# Altium PCB transmitter.PcbDoc
Units mil, origin at the board's own origin, x right, y up, seen from the top; angles counter-clockwise.
Board outline 1968.5 x 3897.64 mil, 2 copper layers (Top Layer, Bottom Layer); 38 components, 10 nets, 105 pads, 26 vias.
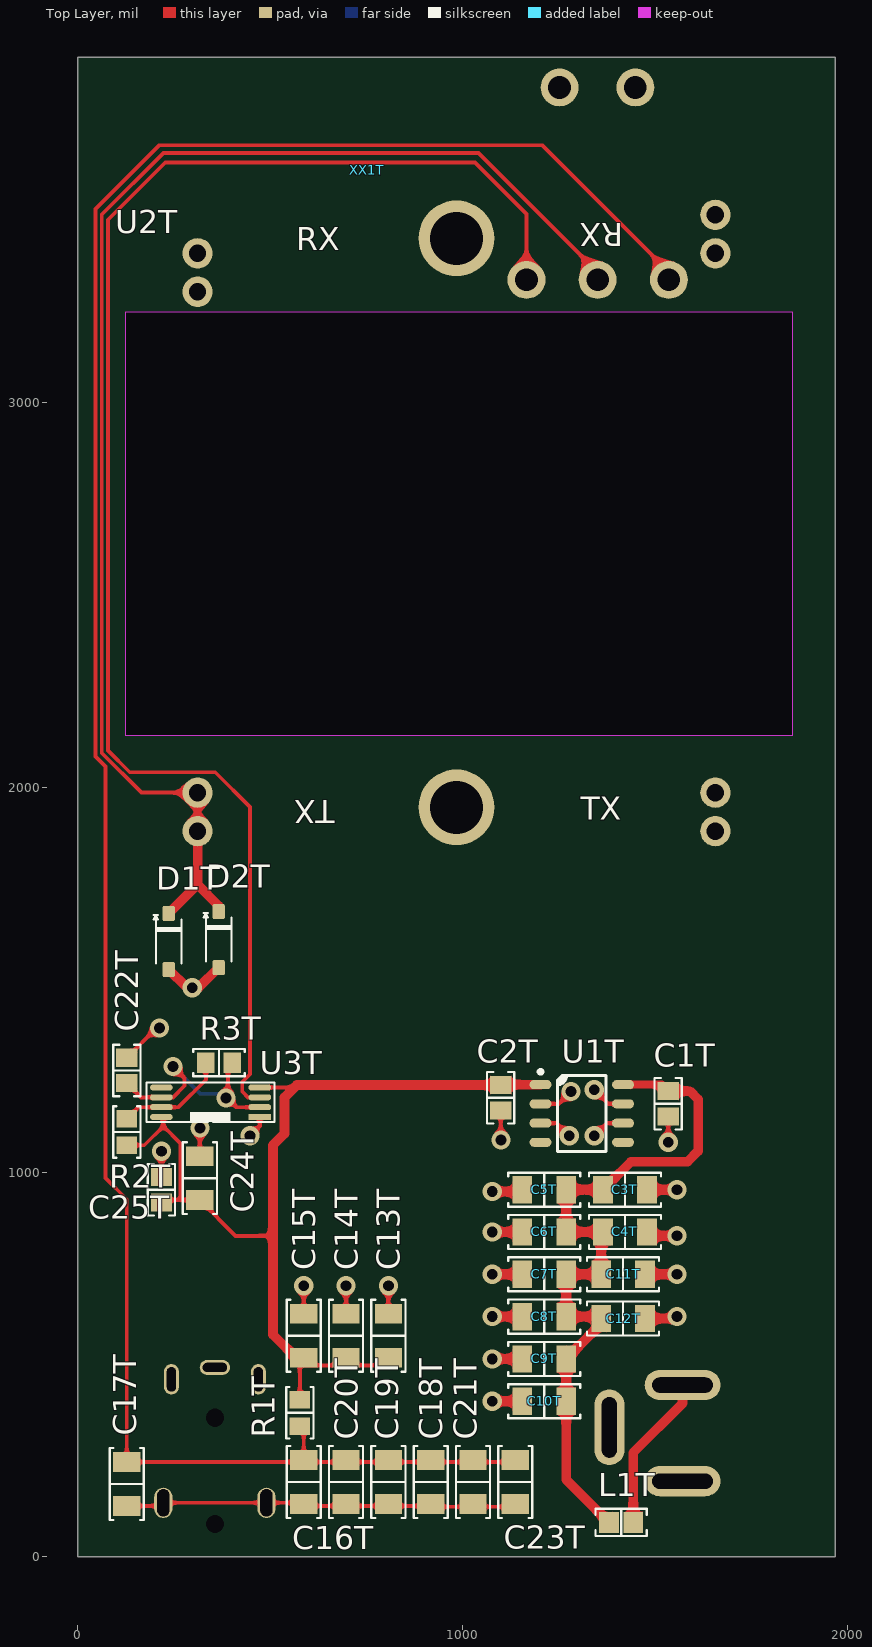
[diagram p0: Top Layer view]
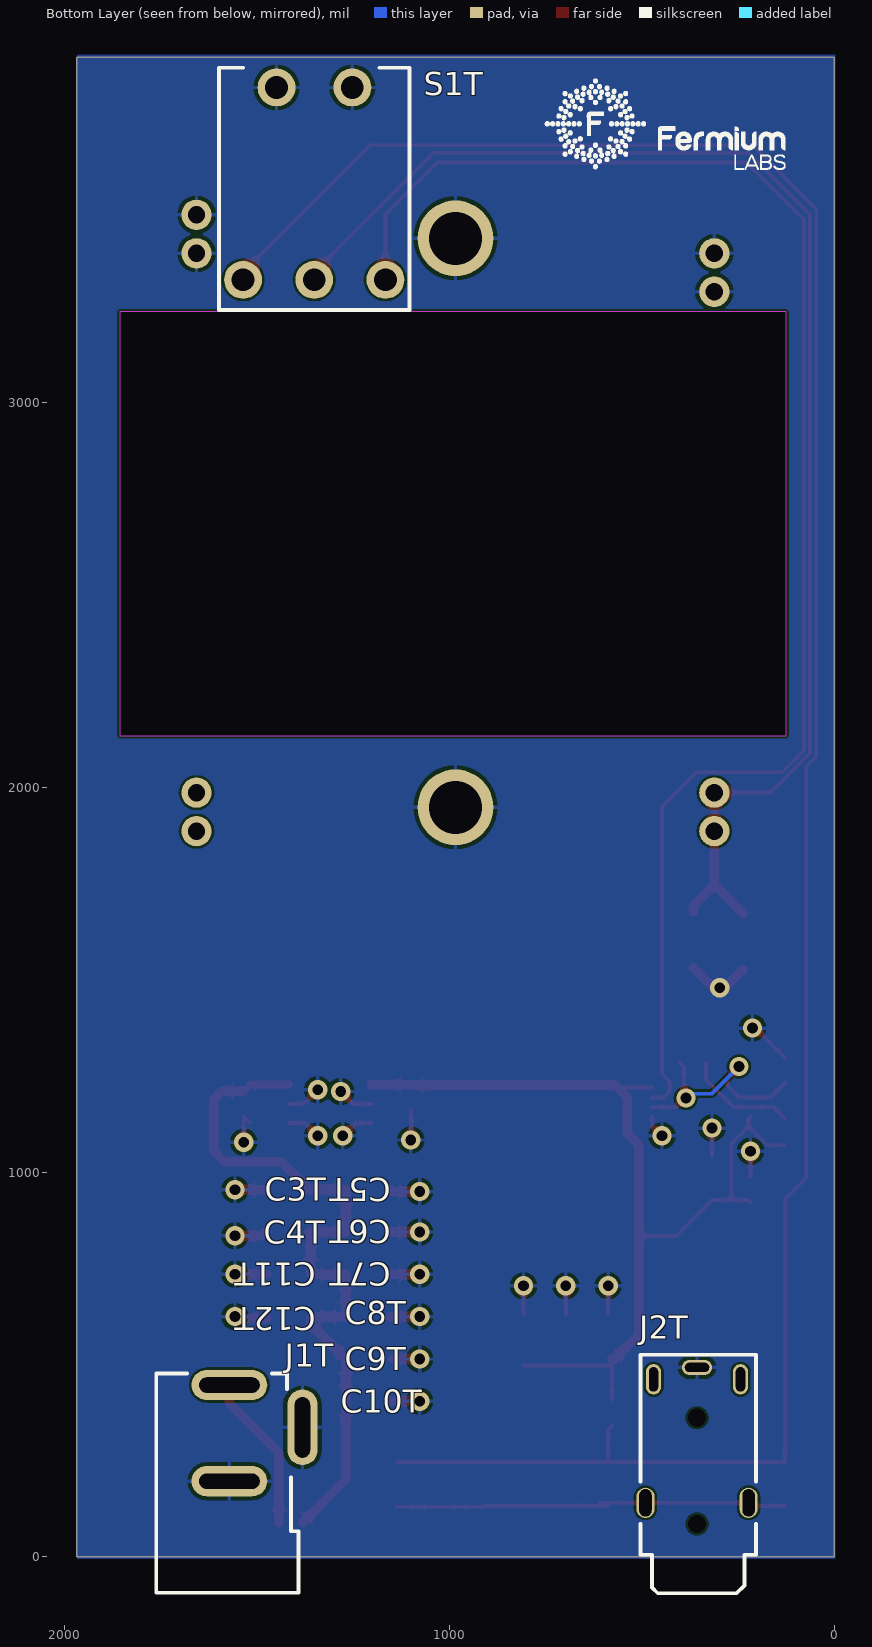
[diagram p1: Bottom Layer view, seen from below]

## Layer stack, top to bottom
Top Solder: solder mask 0.4, Solder Resist, Dk 3.5
Top Layer: signal copper 1.4
Dielectric 1: dielectric 12.6, FR-4, Dk 4.8
Bottom Layer: signal copper 1.4
Bottom Solder: solder mask 0.4, Solder Resist, Dk 3.5

## Board outline
0,0 1968.5,0 1968.5,3897.64 0,3897.64

## Design rules (kind name [scope] priority, off if disabled: settings)
Clearance [All] p1: gap=6 ignorepadtopadclearanceinfootprint=FALSE
FanoutControl Fanout_LCC [All] p1 off: bgadir=Out bgaviamode=Centered fanoutstyle=Auto fanoutdirection=Alternating viagrid=1 // Protel DXP Scope 1 Expression Was: IsLCC   Fanout_LCC (Default Rule)
FanoutControl Fanout_BGA [All] p2 off: bgadir=Out bgaviamode=Centered fanoutstyle=Auto fanoutdirection=Alternating viagrid=1 // Protel DXP Scope 1 Expression Was: IsBGA   Fanout_BGA (Default Rule)
FanoutControl Fanout_SOIC [All] p3 off: bgadir=Out bgaviamode=Centered fanoutstyle=Auto fanoutdirection=Alternating viagrid=1 // Protel DXP Scope 1 Expression Was: IsSOIC   Fanout_SOIC (Default Rule)
FanoutControl Fanout_Default [All] p4: bgadir=Out bgaviamode=Centered fanoutstyle=Auto fanoutdirection=Alternating viagrid=1 // Fanout_Default (Default Rule)
FanoutControl Fanout_Small [All] p5 off: bgadir=Out bgaviamode=Centered fanoutstyle=Auto fanoutdirection=Alternating viagrid=1 // Protel DXP Scope 1 Expression Was: (CompPinCount < 5)   Fanout_Small (Default Rule)
HoleSize [All] p1: absolutevalues=TRUE maxlimit=99999 minlimit=11.81 maxpercent=80.000 minpercent=20.000
MinimumSolderMaskSliver [All] p1 off: minsoldermaskwidth=10
PolygonConnect [All] p1: connectstyle=Relief reliefconductorwidth=10 reliefentries=4 polygonreliefangle="90 Angle" airgapwidth=10
RoutingVias [All] p1: holewidth=28 width=50 viastyle="Through Hole" minholewidth=28 minwidth=50 maxholewidth=28 maxwidth=50
SilkToSilkClearance [All] p1: silktosilkclearance=7.87
SilkToSolderMaskClearance [All] p1 off: minsilkscreentomaskgap=10 clearancetoexposedcopper=TRUE // Protel DXP Scope 1 Expression Was: IsPad
SolderMaskExpansion [All] p1: expansion=2
Width [All] p1: maxlimit=200 minlimit=6 preferedwidth=10
21 further rules are at their usual default settings.

## Components (designator, comment, footprint, x,y, rotation, side; value= is the part's Value field where it differs from the comment)
C1T "100nF 0805" "CAP 0805_2012" 1534.57,1177.91 r270 top
C2T "100nF 0805" "CAP 0805_2012" 1099.24,1193.65 r270 top
C3T "10uF 25V 1206" "CAP 1206_3216" 1422.24,954.65 r0 top
C4T "10uF 25V 1206" "CAP 1206_3216" 1422.24,844.65 r0 top
C5T "10uF 25V 1206" "CAP 1206_3216" 1212.24,954.65 r180 top
C6T "10uF 25V 1206" "CAP 1206_3216" 1212.24,844.65 r180 top
C7T "10uF 25V 1206" "CAP 1206_3216" 1212.24,734.65 r180 top
C8T "10uF 25V 1206" "CAP 1206_3216" 1212.24,624.65 r180 top
C9T "10uF 25V 1206" "CAP 1206_3216" 1212.24,514.65 r180 top
C10T "10uF 25V 1206" "CAP 1206_3216" 1212.24,404.65 r180 top
C11T "10uF 25V 1206" "CAP 1206_3216" 1417.24,734.65 r0 top
C12T "10uF 25V 1206" "CAP 1206_3216" 1417.24,619.65 r0 top
C13T "10uF 25V 1206" "CAP 1206_3216" 807.24,574.65 r90 top
C14T "10uF 25V 1206" "CAP 1206_3216" 697.24,574.65 r90 top
C15T "10uF 25V 1206" "CAP 1206_3216" 587.24,574.65 r90 top
C16T "10uF 25V 1206" "CAP 1206_3216" 587.24,194.65 r270 top
C17T "10uF 25V 1206" "CAP 1206_3216" 127.24,189.65 r270 top
C18T "10uF 25V 1206" "CAP 1206_3216" 917.24,194.65 r270 top
C19T "10uF 25V 1206" "CAP 1206_3216" 807.24,194.65 r270 top
C20T "10uF 25V 1206" "CAP 1206_3216" 697.24,194.65 r270 top
C21T "10uF 25V 1206" "CAP 1206_3216" 1027.24,194.65 r270 top
C22T "100nF 0805" "CAP 0805_2012" 127.24,1264.65 r90 top
C23T "10uF 25V 1206" "CAP 1206_3216" 1137.24,194.65 r270 top
C24T "10uF 25V 1206" "CAP 1206_3216" 317.24,984.65 r90 top
C25T "100nF 0805" "CAP 0805_2012" 217.24,954.65 r90 top
D1T "5.6V" SOD123 236.24,1599.65 r270 top
D2T "D Schottky" SOD123 366.24,1604.65 r270 top
J1T "DC-10A FC68148" dc-jack 1571.8,446.85 r270 bottom
J2T "FC68125" FC68125 -196.76,-854.35 r90 bottom
L1T "BLM21AG102SN1D" "FER 0805_2012" 1412.24,89.65 r180 top
R1T "33R 0805" "RES 0805_2012" 577.24,374.65 r270 top
R2T "1K 0805" "RES 0805_2012" 127.24,1104.65 r270 top
R3T "10K 0805" "RES 0805_2012" 367.24,1284.65 r180 top
S1T "TSM102C3" TSM102C3 1536.24,3319.65 r180 bottom
U1T "L78L06ACD" "ST SOIC-8N" 1309.96,1152.65 r0 top
U2T "HB100" HB100-BURIED 1657.24,1886.65 r90 top
U3T "NE555PWR" TSSOP8 473.15,1143.46 r180 top
XX1T "FermiumLABS Logo" frm-med 752.24,3604.65 r180 top

## Footprints (in the part's own frame and the unit in brackets; to place one, negate y for a bottom-side part, rotate by r counter-clockwise, add the part's x,y. Pads: shape width x height; smd on the part's side, far side on the other; paste and mask are expansions set on the pad)
"CAP 0805_2012" [mm]
  rect 1.2x1.4 smd: 1(-0.838,0) 2(0.838,0)
  silkscreen extent -1.7,-0.9 1.7,0.9, body extent -1,-0.64 1,0.64, height 1.26
"CAP 1206_3216" [mm]
  rect 1.3x1.8 smd: 1(-1.45,0) 2(1.45,0)
  silkscreen extent -2.37,-1.12 2.37,1.12, body extent -1.6,-0.81 1.6,0.81, height 1.62
dc-jack [mm]
  oval 2x5 hole 1 slot 4 at 90 deg: 1(0,0) 3(6.35,0)
  oval 5x2 hole 1 slot 4 at 0 deg: 2(2.794,4.826)
  silkscreen extent -0.76,-4.83 13.72,4.57, body extent -0.76,-4.62 13.54,5.13, height 11.3
FC68125 [mm]
  oval 1x2 hole 0.6 slot 1.6 at 90 deg: 1(34.214,14.046)
  oval 2x1 hole 0.6 slot 1.6 at 0 deg: 2(33.426,16.916) 6(33.426,11.176)
  oval 2x1.2 hole 0.8 slot 1.8 at 0 deg: 3(25.273,10.643) 3(25.273,17.45)
  round 0 hole 1.2: ""(23.876,14.046) ""(30.886,14.046)
  silkscreen extent 19.3,10.16 35.05,17.78, body extent 19.37,10.31 34.47,17.71, height 6.2
"FER 0805_2012" [mm]
  rect 1.3x1.4 smd: 1(-0.8,0) 2(0.8,0)
  silkscreen extent -1.7,-0.9 1.7,0.9, body extent -1,-0.64 1,0.64, height 1.26
frm-med [mil]
HB100-BURIED [mm]
  round 2 hole 1.143: 1(0,34.188) 1(2.54,34.188) 2(0,0) 2(2.54,0) 3(38.151,0) 3(40.691,0) 4(35.611,34.188) 4(38.151,34.188)
  round 5 hole 3.5: 5(1.575,17.094) 5(39.141,17.094)
  Keep-Out Layer board cut-out: 6.286,-5.066 6.286,38.934 34.286,38.934 34.286,-5.066
  body extent -3.02,-3 43.48,37, height 3
"RES 0805_2012" [mm]
  rect 1.15x1.35 smd: 1(-0.875,0) 2(0.875,0)
  silkscreen extent -1.7,-0.9 1.7,0.9, body extent -0.95,-0.62 1.05,0.63, height 0.6
SOD123 [mm] "SOD-123; 2 Leads; Body 2.7 x 1.6 mm, (LxW)"
  round 0.508 on Mech15: 0(0,0)
  rrect25% 1x0.8 smd: A(1.85,0) K(-1.85,0)
  silkscreen extent -1.75,-1 1.45,0.85, body extent -1.95,-0.9 1.95,0.9, height 1.18
"ST SOIC-8N" [mm] "SOIC, 8-Leads, Body 4.90x3.90mm, Pitch 1.27mm, IPC Medium Density"
  oval 1.45x0.6 smd: 1(-2.725,1.905) 2(-2.725,0.635) 3(-2.725,-0.635) 4(-2.725,-1.905) 5(2.725,-1.905) 6(2.725,-0.635) 7(2.725,0.635) 8(2.725,1.905)
  silkscreen extent -2.85,-2.5 1.6,2.88, body extent -3.01,-2.45 3.01,2.45, height 1.5
TSM102C3 [mm]
  round 2.5 hole 1.5: 1(0,0) 2(4.699,0) 3(9.398,0) G(2.21,12.7) G(7.214,12.7)
  silkscreen extent -1.6,-2 11,14, body extent -1.9,-0.65 11.3,34.15, height 8.47
TSSOP8 [mm]
  rect 1.5x0.4 smd: 1(0,0)
  oval 1.5x0.4 smd: 2(0,-0.65) 3(0,-1.3) 4(0,-1.95) 5(6.5,-1.95) 6(6.5,-1.3) 7(6.5,-0.65) 8(6.5,0)
  silkscreen extent -0.98,-2.28 7.48,0.33, body extent -0.06,-2.26 6.52,0.3, height 1.04

## Part data
C1T C2T C22T C25T: library part C100nF, "Capacitor", Manufacturer=YAGEO, Manufacturer Part Number=CC0805JRX7R9BB104, Part Number=C100nF
C3T C4T C5T C6T C7T C8T C9T C10T C11T C12T C13T C14T C15T C16T C17T C18T C19T C20T C21T C23T C24T: library part C10uF, "Capacitor", Manufacturer=SAMSUNG, Manufacturer Part Number=CL31A106KAHNNNE, Part Number=C10uF
D1T: library part "D Zener", "Zener Diode", Manufacturer=Diodes, Manufacturer Part Number=BZT52C5V6-7-F, Part Number="D Zener"
D2T: "Schottky Diode", Manufacturer="FAIRCHILD SEMICONDUCTOR", Manufacturer Part Number=MBR0520L, Part Number="D Schottky"
J1T: library part jackdc, Manufacturer=CLIFF, Manufacturer Part Number="DC-10A FC68148", Part Number=jackdc
J2T: Manufacturer=CLIFF, Manufacturer Part Number=FC68125, Part Number=FC68125
L1T: library part "Inductor Iron", "Magnetic-Core Inductor", Manufacturer=Murata, Manufacturer Part Number=BLM21AG102SN1D, Part Number="Inductor Iron"
R1T: library part R33, "Resistor", Manufacturer=Vishay, Manufacturer Part Number=CRCW080533R0JNTABC, Part Number=R33
R2T: library part R1K, "Resistor", Manufacturer="Royal Electronic Factory", Manufacturer Part Number=0805S8J0102T5E, Part Number=R1K
R3T: library part R10K, "Resistor", Manufacturer="Royal Electronic Factory", Manufacturer Part Number=0805S8J0103T5E, Part Number=R10K
S1T: Manufacturer Part Number=Ninigi, Manufacturer=TSM102C3, Part Number=TSM102C3
U1T: Manufacturer="ST Microelectronics", Manufacturer Part Number=L78L06ACD, Part Number=L78L06ACD
U2T: Manufacturer="China unspecified", Manufacturer Part Number=HB100, Part Number=HB100
U3T: Manufacturer="Texas Instruments", Manufacturer Part Number=NE555PWR, Part Number=NE555PWR
XX1T: library part fermiumlabs-logo, Part Number=fermiumlabs-logo

## Via types
v1: diameter 50, hole 28, Top Layer to Bottom Layer, 26 vias

## Nets (pads, with @x,y where several pads share a name; then routed paths per layer and width w, separated by ;. In a path a pad name is that pad's centre, name@x,y a point inside that pad or via, vN(x,y) a via of type N, cw(c..) or ccw(c..) an arc to the next point about the centre after c; other vN are vias at no path point)
12V: C1T.1 C3T.1 C4T.1 C5T.1 C6T.1 C7T.1 C8T.1 C9T.1 C10T.1 C11T.1 C12T.1 L1T.2 U1T.8 | length 1956
  Top Layer w10: C1T.1@1517.57,1227.91 C1T.1
  Top Layer w20: U1T.8@1416.85,1227.91 C1T.1@1517.57,1227.91
  Top Layer w25: L1T.2 1269.33,201.06 C10T.1 C9T.1 1360.16,605.47 C12T.1 1355.16,624.65 C8T.1 C7T.1 C11T.1 1360.16,839.65 C4T.1 C6T.1 C5T.1 C3T.1 1437.66,1027.15 1584.74,1027.15 1612.24,1054.65 1612.24,1189.65 1590.98,1210.91 C1T.1
GND: C1T.2 C2T.2 C3T.2 C4T.2 C5T.2 C6T.2 C7T.2 C8T.2 C9T.2 C10T.2 C11T.2 C12T.2 C13T.2 C14T.2 C15T.2 C22T.2 C24T.2 C25T.2 D1T.A D2T.A J1T.2 J1T.3 J2T.1 S1T.G U1T.2 U1T.3 U1T.6 U1T.7 U2T.3 U2T.4 U2T.5 U3T.1 | length 1984.3
  Top Layer w10: C22T.2 204.24,1374.65 v1(212.24,1374.65) ; C25T.2 v1(217.24,1054.65) ; C24T.2 v1(317.24,1114.65) ; v1(447.24,1094.65) 473.15,1120.55 U3T.1 ; C15T.2 v1@587.24,694.65 ; C14T.2 v1@697.24,684.65 ; C13T.2 v1@807.24,694.65 ; C2T.2 1099.24,1084.65 v1(1100.24,1083.65) ; U1T.3 1244.24,1127.65 v1(1277.24,1094.65) ; U1T.2 1250.24,1177.65 v1(1282.24,1209.65) ; v1(1342.24,1094.65) 1375.24,1127.65 U1T.6 ; v1(1342.24,1214.65) 1379.24,1177.65 U1T.7 ; C1T.2@1517.57,1127.91 C1T.2 v1(1534.57,1077.91)
  Top Layer w25: D1T.A 283.41,1479.65 v1(297.24,1479.65) 314.08,1479.65 D2T.A ; v1(1077.24,404.65) C10T.2 ; v1(1077.24,514.65) C9T.2@1147.24,514.65 ; v1(1077.24,624.65) C8T.2 ; v1(1077.24,734.65) C7T.2 ; v1(1077.24,844.65) C6T.2 ; v1(1077.24,949.65) 1150.16,949.65 C5T.2 ; C12T.2 1552.24,619.65 v1(1557.24,624.65) ; C11T.2 v1(1557.24,734.65) ; C4T.2 1489.33,834.65 v1(1557.24,834.65) ; C3T.2 v1(1557.24,954.65)
  other v1: 587.24,704.65 697.24,704.65 807.24,704.65
NetC16T_1: C16T.1 C17T.1 C18T.1 C19T.1 C20T.1 C21T.1 C23T.1 R1T.2 S1T.1 | length 6114.4
  Top Layer w10: R1T.2 587.24,330.2 C16T.1 C16T.1@587.24,246.73 ; C23T.1@1137.24,244.65 1135.16,246.73 C16T.1@587.24,246.73 ; S1T.1 1536.24,3339.65 1206.24,3669.65 212.24,3669.65 46.24,3503.65 46.24,2080.65 72.24,2054.65 72.24,984.65 127.24,929.65 C17T.1 C16T.1@587.24,246.73
NetC16T_2: C16T.2 C17T.2 C18T.2 C19T.2 C20T.2 C21T.2 C23T.2 J2T.3 | length 1047
  Top Layer w10: C17T.2 214.16,132.56 222.24,140.65 490.24,140.65 C16T.2@595.33,140.65 ; C16T.2@608.24,141.56 607.33,140.65 C16T.2@595.33,140.65 ; C23T.2@1137.24,130.47 1027.24,130.47 909.33,130.47 907.24,132.56 807.24,132.56 697.24,132.56 587.24,132.56 C16T.2@595.33,140.65
NetC22T_1: C22T.1 R3T.1 U3T.2 U3T.6 | length 602.1
  Top Layer w10: C22T.1 164.24,1194.65 U3T.6 247.24,1194.65 277.24,1224.65 277.24,1244.65 v1(247.24,1274.65) ; R3T.1 390.24,1273.2 390.24,1191.65 412.83,1169.06 U3T.2
  Bottom Layer w10: v1(247.24,1274.65) 317.74,1204.15 373.74,1204.15 v1(385.24,1192.65)
NetD1T_K: D1T.K D2T.K S1T.2 U2T.1 | length 3633.4
  Top Layer w10: U2T.1@311.24,1886.65 311.24,1986.65 165.24,1986.65 62.24,2089.65 62.24,3489.65 222.24,3649.65 1041.24,3649.65 1351.24,3339.65 S1T.2
  Top Layer w25: D1T.K 311.24,1747.48 ; U2T.1@311.24,1886.65 311.24,1747.48 ; D2T.K 366.24,1692.48 311.24,1747.48
NetJ1T_1: J1T.1 L1T.1 | length 410.3
  Top Layer w25: L1T.1 1443.74,271.14 1571.8,399.2 J1T.1
NetR2T_1: R2T.1 R3T.2 U3T.7 | length 291.9
  Top Layer w10: R2T.1 157.2,1169.06 U3T.7 261.65,1169.06 332.8,1240.2 R3T.2
NetS1T_3: S1T.3 U3T.3 | length 3985.7
  Top Layer w10: U3T.3 442.24,1194.65 427.24,1209.65 427.24,1234.65 447.24,1254.65 447.24,1949.65 357.24,2039.65 134.87,2039.65 78.24,2096.27 78.24,3475.65 227.24,3624.65 1032.24,3624.65 1166.24,3490.65 S1T.3
VCC: C2T.1 C13T.1 C14T.1 C15T.1 C24T.1 C25T.1 R1T.1 R2T.2 U1T.1 U3T.4 U3T.8 | length 2505.9
  Top Layer w10: R2T.2 172.8,1070.2 222.24,1119.65 ; C25T.1 223.16,927.56 267.24,927.56 ; U3T.8 222.24,1138.46 222.24,1119.65 ; U3T.4 562.83,1220.24 ; 507.24,834.65 410.16,834.65 C24T.1 267.24,927.56 ; R1T.1 C15T.1@577.24,514.65 ; C15T.1@587.24,497.56 C13T.1@807.24,497.56 ; 222.24,1119.65 267.24,1074.65 267.24,927.56
  Top Layer w25: C15T.1@577.24,514.65 573.7,511.1 507.24,577.56 507.24,834.65 507.24,1070.5 537.18,1100.43 537.18,1194.58 562.83,1220.24 569.24,1226.65 C2T.1 1100.24,1227.65 U1T.1
pads on no net: D1T.0 D2T.0 J2T. J2T.2 J2T.6 U1T.4 U1T.5 U2T.2 U3T.5

## Polygon pours and split planes (outlines as drawn)
GND on Bottom Layer "Bottom Layer-GND" (solid, pour order 0): -2.76,-5.35 1967.24,-5.35 1967.24,3904.65 -2.76,3904.65

## Silkscreen, mask and mechanical layers (free items; w line width, h text height)
Mechanical 1:
  lines w10: 0,0 1968.5,0 1968.5,3897.64 0,3897.64 0,0 ; 114.4,2144.3 1846.69,2144.3 1846.69,3246.66 114.4,3246.66 114.4,2144.3

## Text inside footprints (layer, text, board x,y; h text height)
U2T: Top Overlay "RX" at 567.24,3396.65 h60; Top Overlay "TX" at 1307.24,1916.65 h60; Top Overlay "TX" at 667.24,1966.65 h60 r180; Top Overlay "RX" at 1417.24,3466.65 h60 r180; Mechanical 1 "## CUT CUT CUT ## / ## CUT CUT CUT ## / ## CUT CUT CUT ## / ## CUT CUT CUT ## / ## CUT CUT CUT ## / ## CUT CUT CUT ## / ## CUT CUT CUT ## / ## CUT CUT CUT ## / ## CUT CUT CUT ## / ## CUT CUT CUT ## / ## CUT CUT CUT ## / ## CUT CUT CUT ## / ## CUT CUT CUT ## / ## CUT CUT CUT ## / ## CUT CUT CUT ## / ## CUT CUT CUT ## / ## CUT CUT CUT ## / ## CUT CUT CUT ##" at 1847.24,2176.65 h60 r90